# Altium PCB GarageBeamSafety.PcbDoc
Units mil, origin at the board's own origin, x right, y up, seen from the top; angles counter-clockwise.
Board outline 4330.71 x 3346.46 mil, 2 copper layers (Top Layer, Bottom Layer); 50 components, 35 nets, 204 pads, 0 vias.
Unrouted connection lines stored in the file: 107.
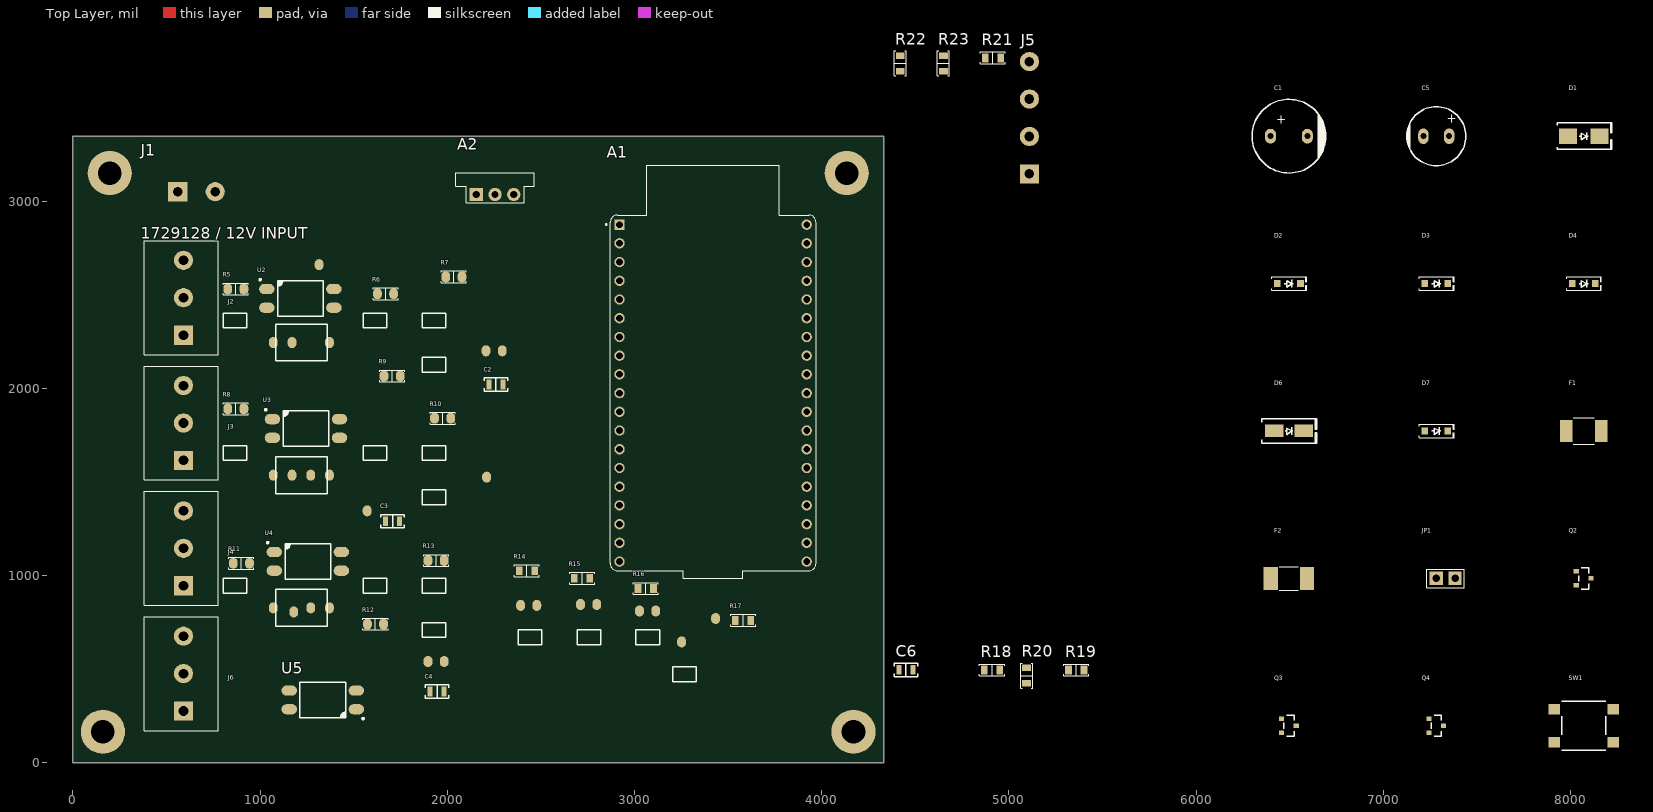
[diagram p0: Top Layer view]
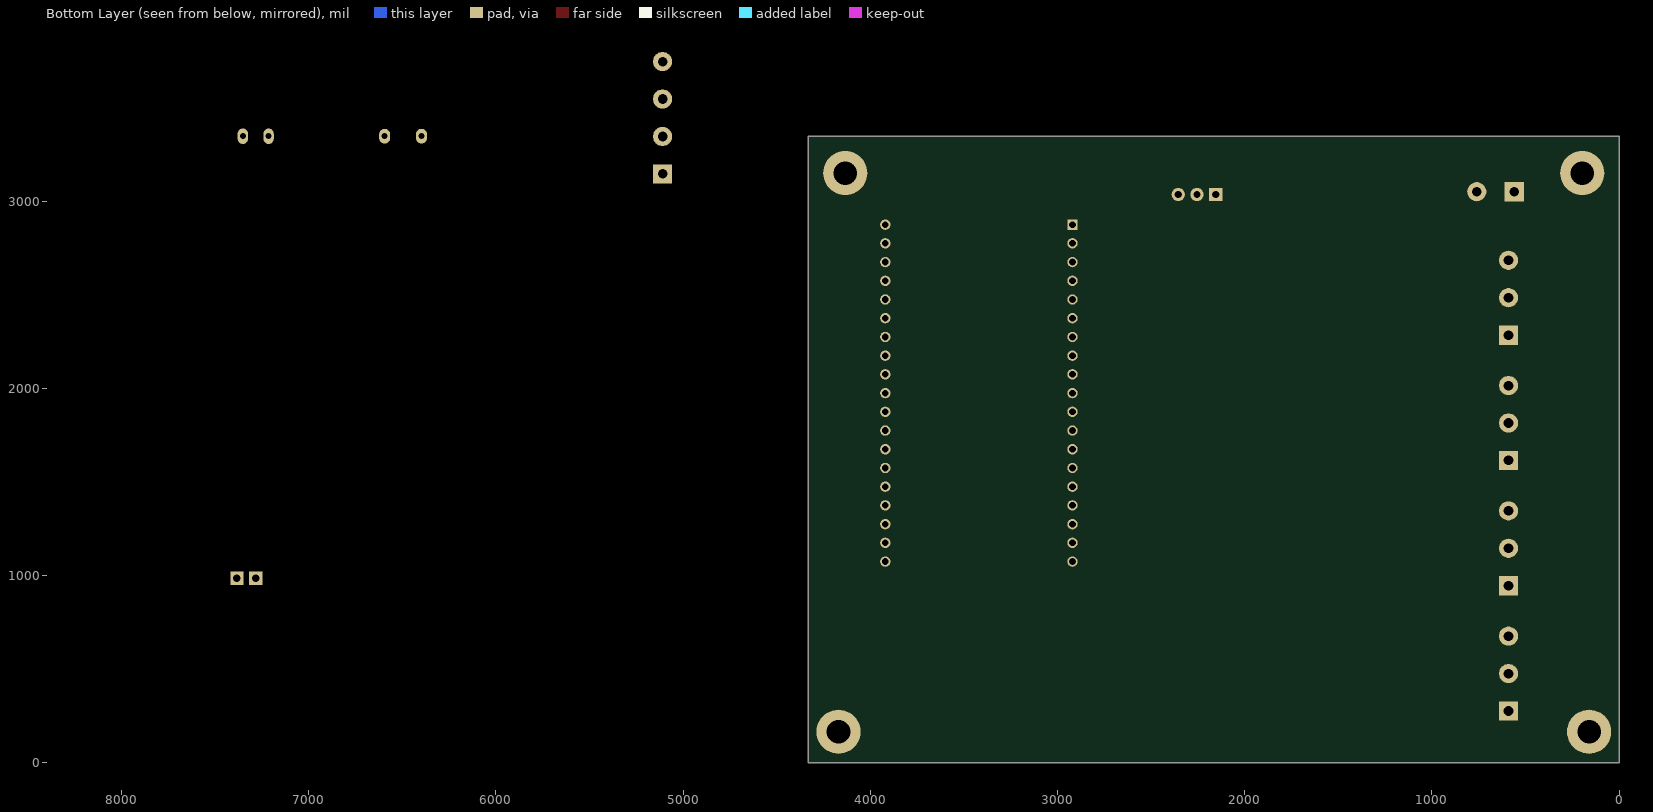
[diagram p1: Bottom Layer view, seen from below]

## Layer stack, top to bottom
Top Solder: solder mask 0.4, Solder Resist, Dk 3.5
Top Layer: signal copper 1.4
Dielectric 1: dielectric 12.6, FR-4, Dk 4.8
Bottom Layer: signal copper 1.4
Bottom Solder: solder mask 0.4, Solder Resist, Dk 3.5

## Board outline
0,0 4330.71,0 4330.71,3346.46 0,3346.46

## Design rules (kind name [scope] priority, off if disabled: settings)
Clearance [All] p1: gap=10 ignorepadtopadclearanceinfootprint=FALSE
PolygonConnect [All] p1: connectstyle=Relief reliefconductorwidth=10 reliefentries=4 polygonreliefangle="90 Angle" airgapwidth=10
RoutingVias [All] p1: holewidth=28 width=50 viastyle="Through Hole" minholewidth=28 minwidth=50 maxholewidth=28 maxwidth=50
SolderMaskExpansion [All] p1: expansion=4 istentingtop=FALSE
Width [All] p1: maxlimit=10 minlimit=10 preferedwidth=10
30 further rules are at their usual default settings.

## Components (designator, comment, footprint, x,y, rotation, side; value= is the part's Value field where it differs from the comment)
A1 "ESP32-DEVKITC-32E" MODULE_ESP32-DEVKITC-32E 3420,1975 r0 top
A2 "OKI-78SR-5/1.5-W36-C" MURATA_OKI78SR_VERTICAL 2155,3035 r0 top
C1 "470uF / 25V" PANASONIC_EEUFR1E471_D10_P5 6496.06,3346.46 r0 top
C2 "100nF" "MURATA GRM21B 0805_2012" 2260,2020 r0 top
C3 "100nF" "MURATA GRM21B 0805_2012" 1707.6,1290 r0 top
C4 "100nF" "MURATA GRM21B 0805_2012" 1945,380 r0 top
C5 "470uF / 10V" PANASONIC_EEUFR1A471_D8_P3_5 7283.46,3346.46 r0 top
C6 "100nF" "MURATA GRM21B 0805_2012" 4450,495 r0 top
D1 "SMBJ15A" SMBJ15A_A1_K2 8070.87,3346.46 r0 top value=value
D2 "1N4148W" 1N4148W_SOD123_A1_K2 6496.06,2559.06 r0 top value=value
D3 "1N4148W" 1N4148W_SOD123_A1_K2 7283.46,2559.06 r0 top value=value
D4 "1N4148W" 1N4148W_SOD123_A1_K2 8070.87,2559.06 r0 top value=value
D6 "SS34" SS34_A1_K2 6496.06,1771.65 r0 top value=value
D7 "1N4148W" 1N4148W_SOD123_A1_K2 7283.46,1771.65 r0 top value=value
F1 "1.1A PTC / 24V" BOURNS_MFMSMF110_24X_STYLE2 8070.87,1771.65 r0 top
F2 "0.5A FAST" LITTELFUSE_0451_2410 6496.06,984.25 r0 top
J1 "1729128 / 12V INPUT" PHOENIX_1729128_MKDSN_2_508 560,3050 r0 top
J2 "1715734 / RX1" PHOENIX_1715734_MKDS_3_508 590.55,2283.46 r90 top
J3 "1715734 / RX2" PHOENIX_1715734_MKDS_3_508 590.55,1614.17 r90 top
J4 "1715734 / RX3" PHOENIX_1715734_MKDS_3_508 590.55,944.88 r90 top
J5 "1729144 / RGB OUTPUT" PHOENIX_1729144_MKDSN_4_508 5110,3145 r90 top
J6 "1715734 / RX4" PHOENIX_1715734_MKDS_3_508 590.55,275.59 r90 top
JP1 "REMOVE FOR USB" SAMTEC_TSW102_07_SINGLE 7283.46,984.25 r0 top
Q2 "AO3400A" AO3400A_G1_S2_D3 8070.87,984.25 r0 top
Q3 "AO3400A" AO3400A_G1_S2_D3 6496.06,196.85 r0 top
Q4 "AO3400A" AO3400A_G1_S2_D3 7283.46,196.85 r0 top
R5 "2.2k" "YAGEO RES 0805_2012" 870,2530 r0 top
R6 "10k" "YAGEO RES 0805_2012" 1670,2505 r0 top
R7 "1k" "YAGEO RES 0805_2012" 2035,2595 r0 top
R8 "2.2k" "YAGEO RES 0805_2012" 870,1890 r0 top
R9 "10k" "YAGEO RES 0805_2012" 1705,2065 r0 top
R10 "1k" "YAGEO RES 0805_2012" 1975,1840 r0 top
R11 "2.2k" "YAGEO RES 0805_2012" 900,1065 r0 top
R12 "10k" "YAGEO RES 0805_2012" 1616.34,740 r0 top
R13 "1k" "YAGEO RES 0805_2012" 1940,1080 r0 top
R14 "100R" "YAGEO RES 0805_2012" 2425,1025 r0 top
R15 "100R" "YAGEO RES 0805_2012" 2720,985 r0 top
R16 "100R" "YAGEO RES 0805_2012" 3060,930 r0 top
R17 "100k" "YAGEO RES 0805_2012" 3580,760 r0 top
R18 "2.2k" "YAGEO RES 0805_2012" 4910,495 r0 top
R19 "10k" "YAGEO RES 0805_2012" 5360,495 r0 top
R20 "1k" "YAGEO RES 0805_2012" 5095,465 r90 top
R21 "100k" "YAGEO RES 0805_2012" 4915,3765 r0 top
R22 "10k" "YAGEO RES 0805_2012" 4420,3735 r90 top
R23 "100k" "YAGEO RES 0805_2012" 4650,3735 r90 top
SW1 "ALIGN / TEST" OMRON_B3FS1000P_LOGICAL_1_2 8070.87,196.85 r0 top
U2 "LTV-817S" "LITEON LTV-817" 1215,2480 r0 top
U3 "LTV-817S" "LITEON LTV-817" 1245,1785 r0 top
U4 "LTV-817S" "LITEON LTV-817" 1255,1075 r0 top
U5 "LTV-817S" "LITEON LTV-817" 1335,335 r180 top

## Footprints (in the part's own frame and the unit in brackets; to place one, negate y for a bottom-side part, rotate by r counter-clockwise, add the part's x,y. Pads: shape width x height; smd on the part's side, far side on the other; paste and mask are expansions set on the pad)
1N4148W_SOD123_A1_K2 [mm]
  rect 0.9x0.95 smd: 1(1.575,0) 2(-1.575,0)
  silkscreen extent -2.3,-0.92 2.41,0.92, body extent -1.86,-0.78 1.86,0.77, height 1.35
AO3400A_G1_S2_D3 [mm]
  rect 0.7x0.6 smd: 1(-1,0.95) 2(-1,-0.95) 3(1,0)
  silkscreen extent -0.7,-1.45 0.7,1.45, body extent -1.16,-1.45 1.16,1.45, height 1.5
BOURNS_MFMSMF110_24X_STYLE2 [mm]
  rect 1.68x2.95 smd: 1(-2.39,0) 2(2.39,0)
  silkscreen extent -1.4,-1.8 1.4,1.8
"LITEON LTV-817" [mm]
  oval 2.1x1.4 smd: 1(-4.55,1.27) 2(-4.55,-1.27) 3(4.55,-1.27) 4(4.55,1.27)
  silkscreen extent -5.59,-2.41 3.1,2.66, body extent -5.1,-2.3 5.1,2.3, height 3.85
LITTELFUSE_0451_2410 [mm]
  rect 1.96x3.15 smd: 1(-2.455,0) 2(2.455,0)
  silkscreen extent -1.3,-1.6 1.3,1.6
MODULE_ESP32-DEVKITC-32E [mm]
  rect 1.408x1.408 / inner round 1.408 / far side rect 1.408x1.408 hole 0.9: J2_1(-12.7,22.835)
  round 1.408 hole 0.9: J2_2(-12.7,20.295) J2_3(-12.7,17.755) J2_4(-12.7,15.215) J2_5(-12.7,12.675) J2_6(-12.7,10.135) J2_7(-12.7,7.595) J2_8(-12.7,5.055) J2_9(-12.7,2.515) J2_10(-12.7,-0.025) J2_11(-12.7,-2.565) J2_12(-12.7,-5.105) J2_13(-12.7,-7.645) J2_14(-12.7,-10.185) J2_15(-12.7,-12.725) J2_16(-12.7,-15.265) J2_17(-12.7,-17.805) J2_18(-12.7,-20.345) J2_19(-12.7,-22.885) J3_1(12.7,22.835) J3_2(12.7,20.295) J3_3(12.7,17.755) J3_4(12.7,15.215) J3_5(12.7,12.675) J3_6(12.7,10.135) J3_7(12.7,7.595) J3_8(12.7,5.055) J3_9(12.7,2.515) J3_10(12.7,-0.025) J3_11(12.7,-2.565) J3_12(12.7,-5.105) J3_13(12.7,-7.645) J3_14(12.7,-10.185) J3_15(12.7,-12.725) J3_16(12.7,-15.265) J3_17(12.7,-17.805) J3_18(12.7,-20.345) J3_19(12.7,-22.885)
  silkscreen extent -14.6,-25.13 13.97,30.87, body extent -13.97,-24.8 13.97,30.3, height 6.69
"MURATA GRM21B 0805_2012" [mm]
  rect 0.7x1.3 smd: 1(-0.95,0) 2(0.95,0)
  silkscreen extent -1.58,-0.9 1.58,0.9, body extent -1,-0.63 1,0.63, height 1.25
MURATA_OKI78SR_VERTICAL [mm] "OKI-78SR vertical; KiCad pad layout and embedded KiCad STEP; verify registration before manufacture"
  rect 1.8x1.8 hole 1: 1(0,0)
  round 1.8 hole 1: 2(2.54,0) 3(5.08,0)
  silkscreen extent -2.79,-1.1 7.88,2.92, body extent -2.67,-3.33 7.75,5.27, height 16.52
OMRON_B3FS1000P_LOGICAL_1_2 [mm]
  rect 1.6x1.4 smd: 1(-4,-2.25) 1(4,-2.25) 2(-4,2.25) 2(4,2.25)
  silkscreen extent -3,-3.3 3,3.3
PANASONIC_EEUFR1A471_D8_P3_5 [mm]
  oval 1.4x2.1 hole 0.8: 1(1.75,0) 2(-1.75,0)
  silkscreen extent -4,-4 4,4, body extent -4.01,-4 4,4, height 11.5
PANASONIC_EEUFR1E471_D10_P5 [mm]
  oval 1.5x2 hole 0.8: 1(-2.5,0) 2(2.5,0)
  silkscreen extent -5,-5 5,5, body extent -5,-5 5,5, height 12.7
PHOENIX_1715734_MKDS_3_508 [mm]
  rect 2.6x2.6 hole 1.3: 1(0,0)
  round 2.6 hole 1.3: 2(5.08,0) 3(10.16,0)
  silkscreen extent -2.65,-4.71 12.81,5.31, body extent -3.28,-4.6 12.7,5.2, height 13.8
PHOENIX_1729128_MKDSN_2_508 [mm] "MKDSN 1.5; 5.08mm pitch, 1.3mm drill, authored pads; detailed body STEP not available"
  rect 2.6x2.6 hole 1.3: 1(0,0)
  round 2.6 hole 1.3: 2(5.08,0)
PHOENIX_1729144_MKDSN_4_508 [mm] "MKDSN 1.5; 5.08mm pitch, 1.3mm drill, authored pads; detailed body STEP not available"
  rect 2.6x2.6 hole 1.3: 1(0,0)
  round 2.6 hole 1.3: 2(5.08,0) 3(10.16,0) 4(15.24,0)
SAMTEC_TSW102_07_SINGLE [mm]
  rect 1.8x1.8 hole 1.02: 1(0,0) 2(2.54,0)
  silkscreen extent -1.27,-1.27 3.81,1.27
SMBJ15A_A1_K2 [mm]
  rect 2.45x2.15 smd: 1(2.15,0) 2(-2.15,0)
  silkscreen extent -3.6,-1.8 3.8,1.8, body extent -2.6,-1.8 2.6,1.8, height 2.4
SS34_A1_K2 [mm]
  rect 2.5x1.7 smd: 1(2,0) 2(-2,0)
  silkscreen extent -3.68,-1.65 3.75,1.65, body extent -2.6,-1.37 2.6,1.37, height 2.4
"YAGEO RES 0805_2012" [mm]
  rect 0.9x1.2 smd: 1(-1.05,0) 2(1.05,0)
  silkscreen extent -1.7,-0.8 1.7,0.8, body extent -1,-0.62 1,0.63, height 0.6

## Part data
A1: "The ESP32-DEVKITC-32E transceiver evaluation board from Espressif Systems is a powerful development tool for wireless communication technologies. It supports 802.11 b/g/n Wi-Fi and BluetoothÂ® Smart Ready 4.x (BLE) dual-mode at 2.4GHz, making it ideal for", Manufacturer="Espressif Systems", Manufacturer Part Number=ESP32-DevKitC-32E, Package=None, CAD status="Supplied SnapMagic symbol and linked native footprint", Check_prices=https://www.snapeda.com/parts/ESP32-DEVKITC-32E/Espressif+Systems/view-part/?ref=eda, MF="Espressif Systems", MP=ESP32-DEVKITC-32E, SnapEDA_Link=https://www.snapeda.com/parts/ESP32-DEVKITC-32E/Espressif+Systems/view-part/?ref=snap
A2: library part *, "12 V to regulated 5 V DC/DC module", Manufacturer=Murata, Package=SIP3_BUCK, CAD status="Native module symbol; verified 1 VIN / 2 GND / 3 VOUT; embedded community STEP, registration pending", Datasheet=https://www.murata.com/products/productdata/8807037992990/oki-78sr.pdf, Intended footprint=MURATA_OKI78SR_VERTICAL, Manufacturer Part Number=OKI-78SR-5/1.5-W36-C, Populate=Yes, Symbol provenance="Project-authored native Altium library; based on identified manufacturer part and pinout, not vendor-issued CAD"
C1: library part "Capacitor Cerâmico SMD", "Protected 12 V bulk capacitor", Manufacturer=Panasonic, Manufacturer Part Number=EEU-FR1E471, CAD status="Pin link repaired; placement/routing/DRC not released", cod.=186030, Footprint source="Local PinRepairFootprints.PcbLib; source and polarity checked", Intended footprint=PANASONIC_EEUFR1E471_D10_P5, Polarity="Pin 1 positive; pin 2 negative", Symbol source="Conventional symbol reused from ENERGY.SchDoc", Valor=100nF
C2 C3 C4 C6: library part "Capacitor Cerâmico SMD", "Input RC filter", Manufacturer=Murata, Manufacturer Part Number=GRM21BR71H104KA01L, CAD status="Native Celestial footprint with embedded STEP; existing electrical symbol and pin positions retained; fabrication checks pending", cod.=186030, Footprint source="Celestial Altium Library / Mark Harris / https://altiumlibrary.com", Intended footprint="MURATA GRM21B 0805_2012", Symbol source="Conventional symbol reused from ENERGY.SchDoc", Valor=100nF
C5: library part "Capacitor Cerâmico SMD", "ESP32 Wi-Fi peak-current reservoir", Manufacturer=Panasonic, Manufacturer Part Number=EEU-FR1A471, CAD status="Pin link repaired; placement/routing/DRC not released", cod.=186030, Footprint source="Local PinRepairFootprints.PcbLib; source and polarity checked", Intended footprint=PANASONIC_EEUFR1A471_D8_P3_5, Polarity="Pin 1 positive; pin 2 negative", Symbol source="Conventional symbol reused from ENERGY.SchDoc", Valor=100nF
D1: library part Diode, "15 V TVS suppressor - cathode to positive rail", Manufacturer=Littelfuse, PackageDocument=Sep-1996, Part Number=FDLL4148, CAD status="Pin link repaired; placement/routing/DRC not released", Code_JEDEC=DO-214-AB, Footprint source="Local PinRepairFootprints.PcbLib; source and polarity checked", Intended footprint=SMBJ15A_A1_K2, LatestRevisionDate=17-Jul-2002, LatestRevisionNote="Re-released for DXP Platform.", Manufacturer Part Number=SMBJ15A, PackageReference=SMC, Symbol source="Conventional symbol reused from ENERGY.SchDoc"
D2 D3 D4 D7: library part Diode, "Reverse clamp: A to SIG; K to opto LED anode", Manufacturer=Nexperia, PackageDocument=Sep-1996, Part Number=FDLL4148, CAD status="Pin link repaired; placement/routing/DRC not released", Code_JEDEC=DO-214-AB, Footprint source="Local PinRepairFootprints.PcbLib; source and polarity checked", Intended footprint=1N4148W_SOD123_A1_K2, LatestRevisionDate=17-Jul-2002, LatestRevisionNote="Re-released for DXP Platform.", Manufacturer Part Number=1N4148W, PackageReference=SMC, Symbol source="Conventional symbol reused from ENERGY.SchDoc"
D6: library part Diode, "Series reverse-polarity Schottky diode", Manufacturer=Vishay, Manufacturer Part Number=SS34-E3/57T, PackageDocument=Sep-1996, Part Number=FDLL4148, CAD status="Pin link repaired; placement/routing/DRC not released", Code_JEDEC=DO-214-AB, Footprint source="Local PinRepairFootprints.PcbLib; source and polarity checked", Intended footprint=SS34_A1_K2, LatestRevisionDate=17-Jul-2002, LatestRevisionNote="Re-released for DXP Platform.", PackageReference=SMC, Symbol source="Conventional symbol reused from ENERGY.SchDoc"
F1: library part *, "Resettable 12 V input fuse", Manufacturer=Bourns, Manufacturer Part Number=MF-MSMF110/24X-2, Package=F1812, Voltage rating="24 V", CAD status="Pin link repaired; placement/routing/DRC not released", Footprint source="Local PinRepairFootprints.PcbLib; source and polarity checked", Intended footprint=BOURNS_MFMSMF110_24X_STYLE2, Part Number=MF-MSMF110/24X-2, Populate=Yes
F2: library part *, "RGB cable branch fuse; verify fault clearing with selected supply", Manufacturer=Littelfuse, Manufacturer Part Number=0451.500MRL, Package=FUSE_2410, CAD status="Pin link repaired; placement/routing/DRC not released", Footprint source="Local PinRepairFootprints.PcbLib; source and polarity checked", Intended footprint=LITTELFUSE_0451_2410, Populate=Yes
J1: library part *, "Two-position 5.08 mm screw terminal", Manufacturer="Phoenix Contact", Manufacturer Part Number=1729128, Package=TERM_2_508, CAD status="Native screw-terminal symbol and explicit pad mapping; verify footprint/body before production", Intended footprint=PHOENIX_1729128_MKDSN_2_508, Populate=Yes, Symbol provenance="Project-authored native Altium library; based on identified manufacturer part and pinout, not vendor-issued CAD"
J2 J3 J4 J6: library part *, "12V / GND / NPN signal terminal", Manufacturer="Phoenix Contact", Manufacturer Part Number=1715734, Package="MKDS 1,5/3-5,08", CAD status="Native screw-terminal symbol and explicit pad mapping; verify footprint/body before production", Datasheet=https://www.phoenixcontact.com/en-us/products/printed-circuit-board-terminal-mkds-15-3-508-1715734, Intended footprint=PHOENIX_1715734_MKDS_3_508, Populate=Yes, Symbol provenance="Project-authored native Altium library; based on identified manufacturer part and pinout, not vendor-issued CAD", Wiring="1 brown +12V; 2 blue 0V; 3 black NPN output"
J5: library part *, "Common-anode analogue RGB strip; NOT addressable", Manufacturer="Phoenix Contact", Manufacturer Part Number=1729144, Package=TERM_4_508, CAD status="Native screw-terminal symbol and explicit pad mapping; verify footprint/body before production", Intended footprint=PHOENIX_1729144_MKDSN_4_508, Populate=Yes, Symbol provenance="Project-authored native Altium library; based on identified manufacturer part and pinout, not vendor-issued CAD"
JP1: library part *, "External 5 V disconnect; fit shunt only without USB", Manufacturer=Samtec, Manufacturer Part Number=TSW-102-07-G-S, Package=HEADER_1X02_2.54, CAD status="Pin link repaired; placement/routing/DRC not released", Footprint source="Local PinRepairFootprints.PcbLib; source and polarity checked", Intended footprint=SAMTEC_TSW102_07_SINGLE, Populate=Yes
Q2 Q3 Q4: library part *, "30V NMOS; Rds(on) specified at Vgs=2.5V; limit load to 250mA/channel", Manufacturer="Alpha and Omega Semiconductor", Package=Package_TO_SOT_SMD:SOT-23, 3D asset="lib/upstream-kicad/SOT-23.step; downloaded, native link pending", CAD status="Pin link repaired; placement/routing/DRC not released", Datasheet=https://www.aosmd.com/sites/default/files/res/datasheets/AO3400A.pdf, Footprint source="Local PinRepairFootprints.PcbLib; source and polarity checked", Intended footprint=AO3400A_G1_S2_D3, Manufacturer Part Number=AO3400A, Populate=Yes
R5 R8 R11 R18: library part Res3, "Optocoupler LED current limit", Manufacturer=Yageo, Manufacturer Part Number=RC0805FR-072K2L, CAD status="Native Celestial footprint with embedded STEP; existing electrical symbol and pin positions retained; fabrication checks pending", cod.=185070, Footprint source="Celestial Altium Library / Mark Harris / https://altiumlibrary.com", Grupo=01, Intended footprint="YAGEO RES 0805_2012", Symbol source="Conventional symbol reused from ENERGY.SchDoc", Valor=2.2k
R6 R9 R12 R19: library part Res3, "Pull-up earns unsafe if optocoupler is off", Manufacturer=Yageo, Manufacturer Part Number=RC0805FR-0710KL, CAD status="Native Celestial footprint with embedded STEP; existing electrical symbol and pin positions retained; fabrication checks pending", cod.=185070, Footprint source="Celestial Altium Library / Mark Harris / https://altiumlibrary.com", Grupo=01, Intended footprint="YAGEO RES 0805_2012", Symbol source="Conventional symbol reused from ENERGY.SchDoc", Valor=10k
R7 R10 R13 R20: library part Res3, "Input current limit", Manufacturer=Yageo, Manufacturer Part Number=RC0805FR-071KL, CAD status="Native Celestial footprint with embedded STEP; existing electrical symbol and pin positions retained; fabrication checks pending", cod.=185070, Footprint source="Celestial Altium Library / Mark Harris / https://altiumlibrary.com", Grupo=01, Intended footprint="YAGEO RES 0805_2012", Symbol source="Conventional symbol reused from ENERGY.SchDoc", Valor=1k
R14 R15 R16: library part Res3, "MOSFET gate series resistor", Manufacturer=Yageo, Manufacturer Part Number=RC0805FR-07100RL, CAD status="Native Celestial footprint with embedded STEP; existing electrical symbol and pin positions retained; fabrication checks pending", cod.=185070, Footprint source="Celestial Altium Library / Mark Harris / https://altiumlibrary.com", Grupo=01, Intended footprint="YAGEO RES 0805_2012", Symbol source="Conventional symbol reused from ENERGY.SchDoc", Valor=100R
R17 R21 R23: library part Res3, "Gate-source pull-down; off while ESP32 resets", Manufacturer=Yageo, Manufacturer Part Number=RC0805FR-07100KL, CAD status="Native Celestial footprint with embedded STEP; existing electrical symbol and pin positions retained; fabrication checks pending", cod.=185070, Footprint source="Celestial Altium Library / Mark Harris / https://altiumlibrary.com", Grupo=01, Intended footprint="YAGEO RES 0805_2012", Symbol source="Conventional symbol reused from ENERGY.SchDoc", Valor=100k
R22: library part Res3, "Test button external pull-up", Manufacturer=Yageo, Manufacturer Part Number=RC0805FR-0710KL, CAD status="Native Celestial footprint with embedded STEP; existing electrical symbol and pin positions retained; fabrication checks pending", cod.=185070, Footprint source="Celestial Altium Library / Mark Harris / https://altiumlibrary.com", Grupo=01, Intended footprint="YAGEO RES 0805_2012", Symbol source="Conventional symbol reused from ENERGY.SchDoc", Valor=10k
SW1: library part *, "Momentary test switch", Manufacturer=Omron, Manufacturer Part Number=B3FS-1000P, Package=SW_SMD_6X6, CAD status="Pin link repaired; placement/routing/DRC not released", Footprint source="Local PinRepairFootprints.PcbLib; source and polarity checked", Intended footprint=OMRON_B3FS1000P_LOGICAL_1_2, Populate=Yes
U2 U3 U4 U5: library part *, "Phototransistor optocoupler", Manufacturer=Lite-On, Manufacturer Part Number=LTV-817S-TA1, Package=SMD4, CAD status="Native Celestial footprint with embedded STEP; existing electrical symbol and pin positions retained; fabrication checks pending", Footprint source="Celestial Altium Library / Mark Harris / https://altiumlibrary.com", Intended footprint="LITEON LTV-817", Populate=Yes, Valor=LTV-817S

## Free pads (board coordinates)
  oval 47.24x59.06 smd: 1(826.69,1890) 1(826.69,2530) 1(856.69,1065) 1(1070.47,826.77) 1(1070.47,1535.43) 1(1070.47,2244.09) 1(1571.69,1345) 1(1573.03,740) 1(1626.69,2505) 1(1661.69,2065) 1(1896.69,540) 1(1896.69,1080) 1(1931.69,1840) 1(1991.69,2595) 1(2206.69,2200) 1(2391.69,840) 1(2711.69,845) 1(3026.69,810) 1(3251.69,645) 2(913.31,1890) 2(913.31,2530) 2(943.31,1065) 2(1170.47,1535.43) 2(1170.47,2244.09) 2(1180,805) 2(1659.65,740) 2(1713.31,2505) 2(1748.31,2065) 2(1983.31,540) 2(1983.31,1080) 2(2018.31,1840) 2(2078.31,2595) 2(2210,1525) 2(2293.31,2200) 2(2478.31,840) 2(2798.31,845) 2(3113.31,810) 2(3433.31,770) 3(1270.47,826.77) 3(1270.47,1535.43) 3(1315,2660) 4(1370.47,826.77) 4(1370.47,1535.43) 4(1370.47,2244.09)
  round 236.22 hole 125.98 unplated: H1(160,165) H2(4170,165) H3(196.85,3149.61) H4(4133.86,3149.61)

## Nets (pads, with @x,y where several pads share a name; then routed paths per layer and width w, separated by ;. In a path a pad name is that pad's centre, name@x,y a point inside that pad or via, vN(x,y) a via of type N, cw(c..) or ccw(c..) an arc to the next point about the centre after c; other vN are vias at no path point)
3V3: A1.J2_1 pad.1@1573.03,740 pad.1@1626.69,2505 pad.1@1661.69,2065 R6.1 R9.1 R12.1 R19.1 R22.1
5V_LOGIC: A2.3 C5.2 JP1.1
5V_MCU: A1.J2_19 JP1.2
12V_RGB_FUSED: F2.2 J5.1
12V_SENSOR: C1.2 D1.2 F2.1 J2.1 J3.1 J4.1 J6.1 pad.1@826.69,1890 pad.1@826.69,2530 pad.1@856.69,1065 R5.1 R8.1 R11.1 R18.1
BEAM1_GPIO32: A1.J2_7 pad.1@2206.69,2200 pad.2@2078.31,2595 R7.2
BEAM1_LED_A: D2.2 pad.1@1070.47,2244.09 pad.2@913.31,2530 R5.2 U2.1
BEAM1_RAW: pad.1@1991.69,2595 pad.2@1713.31,2505 pad.4@1370.47,2244.09 R6.2 R7.1 U2.4
BEAM1_SIG: D2.1 J2.3 pad.2@1170.47,2244.09 U2.2
BEAM2_GPIO33: A1.J2_8 pad.1@1571.69,1345 pad.2@2018.31,1840 R10.2
BEAM2_LED_A: D3.2 pad.1@1070.47,1535.43 pad.2@913.31,1890 R8.2 U3.1
BEAM2_RAW: pad.1@1931.69,1840 pad.2@1748.31,2065 pad.4@1370.47,1535.43 R9.2 R10.1 U3.4
BEAM2_SIG: D3.1 J3.3 pad.2@1170.47,1535.43 U3.2
BEAM3_GPIO34: A1.J2_5 pad.1@1896.69,540 pad.2@1983.31,1080 R13.2
BEAM3_LED_A: D4.2 pad.1@1070.47,826.77 pad.2@943.31,1065 R11.2 U4.1
BEAM3_RAW: pad.1@1896.69,1080 pad.2@1659.65,740 pad.4@1370.47,826.77 R12.2 R13.1 U4.4
BEAM3_SIG: D4.1 J4.3 pad.2@1180,805 U4.2
BEAM4_GPIO35: A1.J2_6 R20.2
BEAM4_LED_A: D7.2 R18.2 U5.1
BEAM4_RAW: R19.2 R20.1 U5.4
BEAM4_SIG: D7.1 J6.3 U5.2
BUTTON_GPIO13: A1.J2_15 R22.2 SW1.1
GND: A1.J2_14 A1.J3_1 A1.J3_7 A2.2 C1.1 C5.1 D1.1 J1.2 J2.2 J3.2 J4.2 J6.2 pad.2@1983.31,540 pad.2@2210,1525 pad.2@2293.31,2200 pad.3 Q2.2 Q3.2 Q4.2 R17.2 R21.2 R23.2 SW1.2 U2.3 U3.3 U4.3 U5.3
LED_BLUE_GPIO27: A1.J2_11 R16.1
LED_GREEN_GPIO25: A1.J2_9 pad.1@2391.69,840 R15.1
LED_RED_GPIO26: A1.J2_10 pad.1@2711.69,845 R14.1
NetD6_1: D6.1 F1.2
NetF1_1: F1.1 J1.1
RESERVED_GPIO14: A1.J2_12
RGB_BLUE_GATE: Q4.1 R16.2 R23.1
RGB_BLUE_LOW: J5.4 Q4.3
RGB_GREEN_GATE: Q3.1 R15.2 R21.1
RGB_GREEN_LOW: J5.3 Q3.3
RGB_RED_GATE: Q2.1 R14.2 R17.1
RGB_RED_LOW: J5.2 Q2.3
pads on no net: A1.J2_2 A1.J2_3 A1.J2_4 A1.J2_13 A1.J2_16 A1.J2_17 A1.J2_18 A1.J3_2 A1.J3_3 A1.J3_4 A1.J3_5 A1.J3_6 A1.J3_8 A1.J3_9 A1.J3_10 A1.J3_11 A1.J3_12 A1.J3_13 A1.J3_14 A1.J3_15 A1.J3_16 A1.J3_17 A1.J3_18 A1.J3_19 A2.1 C2.1 C2.2 C3.1 C3.2 C4.1 C4.2 C6.1 C6.2 D6.2

## Silkscreen, mask and mechanical layers (free items; w line width, h text height)
Top Overlay:
  lines w7.87: 803.15,905.51 803.15,984.25 929.13,984.25 929.13,905.51 803.15,905.51 ; 803.15,1614.17 803.15,1692.91 929.13,1692.91 929.13,1614.17 803.15,1614.17 ; 803.15,2322.83 803.15,2401.57 929.13,2401.57 929.13,2322.83 803.15,2322.83 ; 1082.68,728.35 1082.68,925.2 1358.27,925.2 1358.27,728.35 1082.68,728.35 ; 1082.68,1437.01 1082.68,1633.86 1358.27,1633.86 1358.27,1437.01 1082.68,1437.01 ; 1082.68,2145.67 1082.68,2342.52 1358.27,2342.52 1358.27,2145.67 1082.68,2145.67 ; 1551.18,905.51 1551.18,984.25 1677.17,984.25 1677.17,905.51 1551.18,905.51 ; 1551.18,1614.17 1551.18,1692.91 1677.17,1692.91 1677.17,1614.17 1551.18,1614.17 ; 1551.18,2322.83 1551.18,2401.57 1677.17,2401.57 1677.17,2322.83 1551.18,2322.83 ; 1866.14,669.29 1866.14,748.03 1992.13,748.03 1992.13,669.29 1866.14,669.29 ; 1866.14,905.51 1866.14,984.25 1992.13,984.25 1992.13,905.51 1866.14,905.51 ; 1866.14,1377.95 1866.14,1456.69 1992.13,1456.69 1992.13,1377.95 1866.14,1377.95 ; 1866.14,1614.17 1866.14,1692.91 1992.13,1692.91 1992.13,1614.17 1866.14,1614.17 ; 1866.14,2086.61 1866.14,2165.35 1992.13,2165.35 1992.13,2086.61 1866.14,2086.61 ; 1866.14,2322.83 1866.14,2401.57 1992.13,2401.57 1992.13,2322.83 1866.14,2322.83 ; 2377.95,629.92 2377.95,708.66 2503.94,708.66 2503.94,629.92 2377.95,629.92 ; 2692.91,629.92 2692.91,708.66 2818.9,708.66 2818.9,629.92 2692.91,629.92 ; 3007.87,629.92 3007.87,708.66 3133.86,708.66 3133.86,629.92 3007.87,629.92 ; 3204.72,433.07 3204.72,511.81 3330.71,511.81 3330.71,433.07 3204.72,433.07
Mechanical 1:
  circle w7.87: c984.25,787.4 r118.11
  circle w7.87: c984.25,4724.41 r118.11
  circle w7.87: c984.25,8661.42 r118.11
  lines w7.87: 0,0 0,3346.46 4330.71,3346.46 4330.71,0 0,0

## Text inside footprints (layer, text, board x,y; h text height)
C1: Top Overlay "+" at 6427.17,3395.67 h78.74
C5: Top Overlay "+" at 7340.55,3401.57 h78.74